# Altium PCB tach key.PcbDoc
Units mm, origin at the board's own origin, x right, y up, seen from the top; angles counter-clockwise.
Board outline 151 x 86.38 mm, 2 copper layers (Top Layer, Bottom Layer); 89 components, 56 nets, 238 pads, 0 vias.
Unrouted connection lines stored in the file: 5.
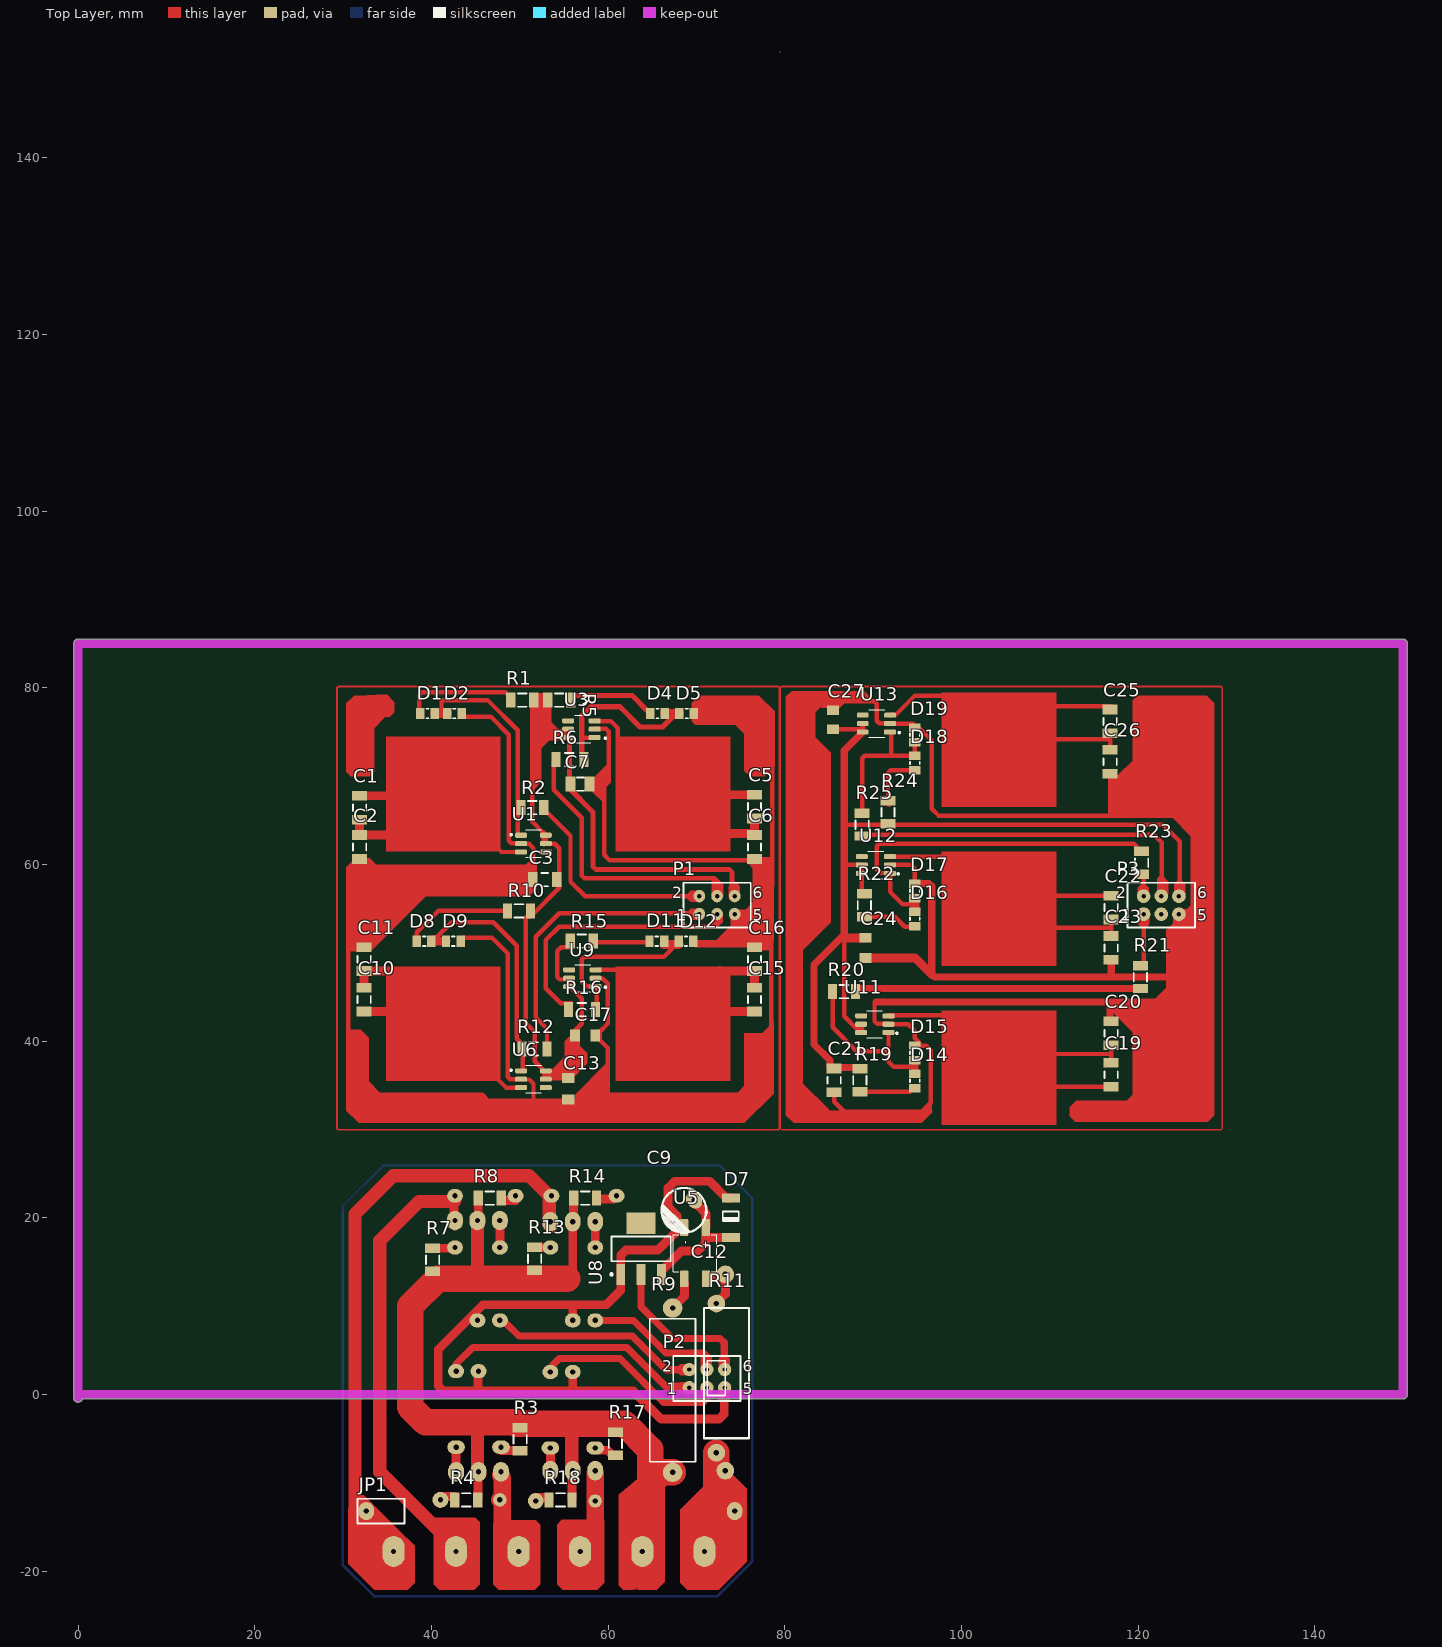
[diagram p0: Top Layer view]
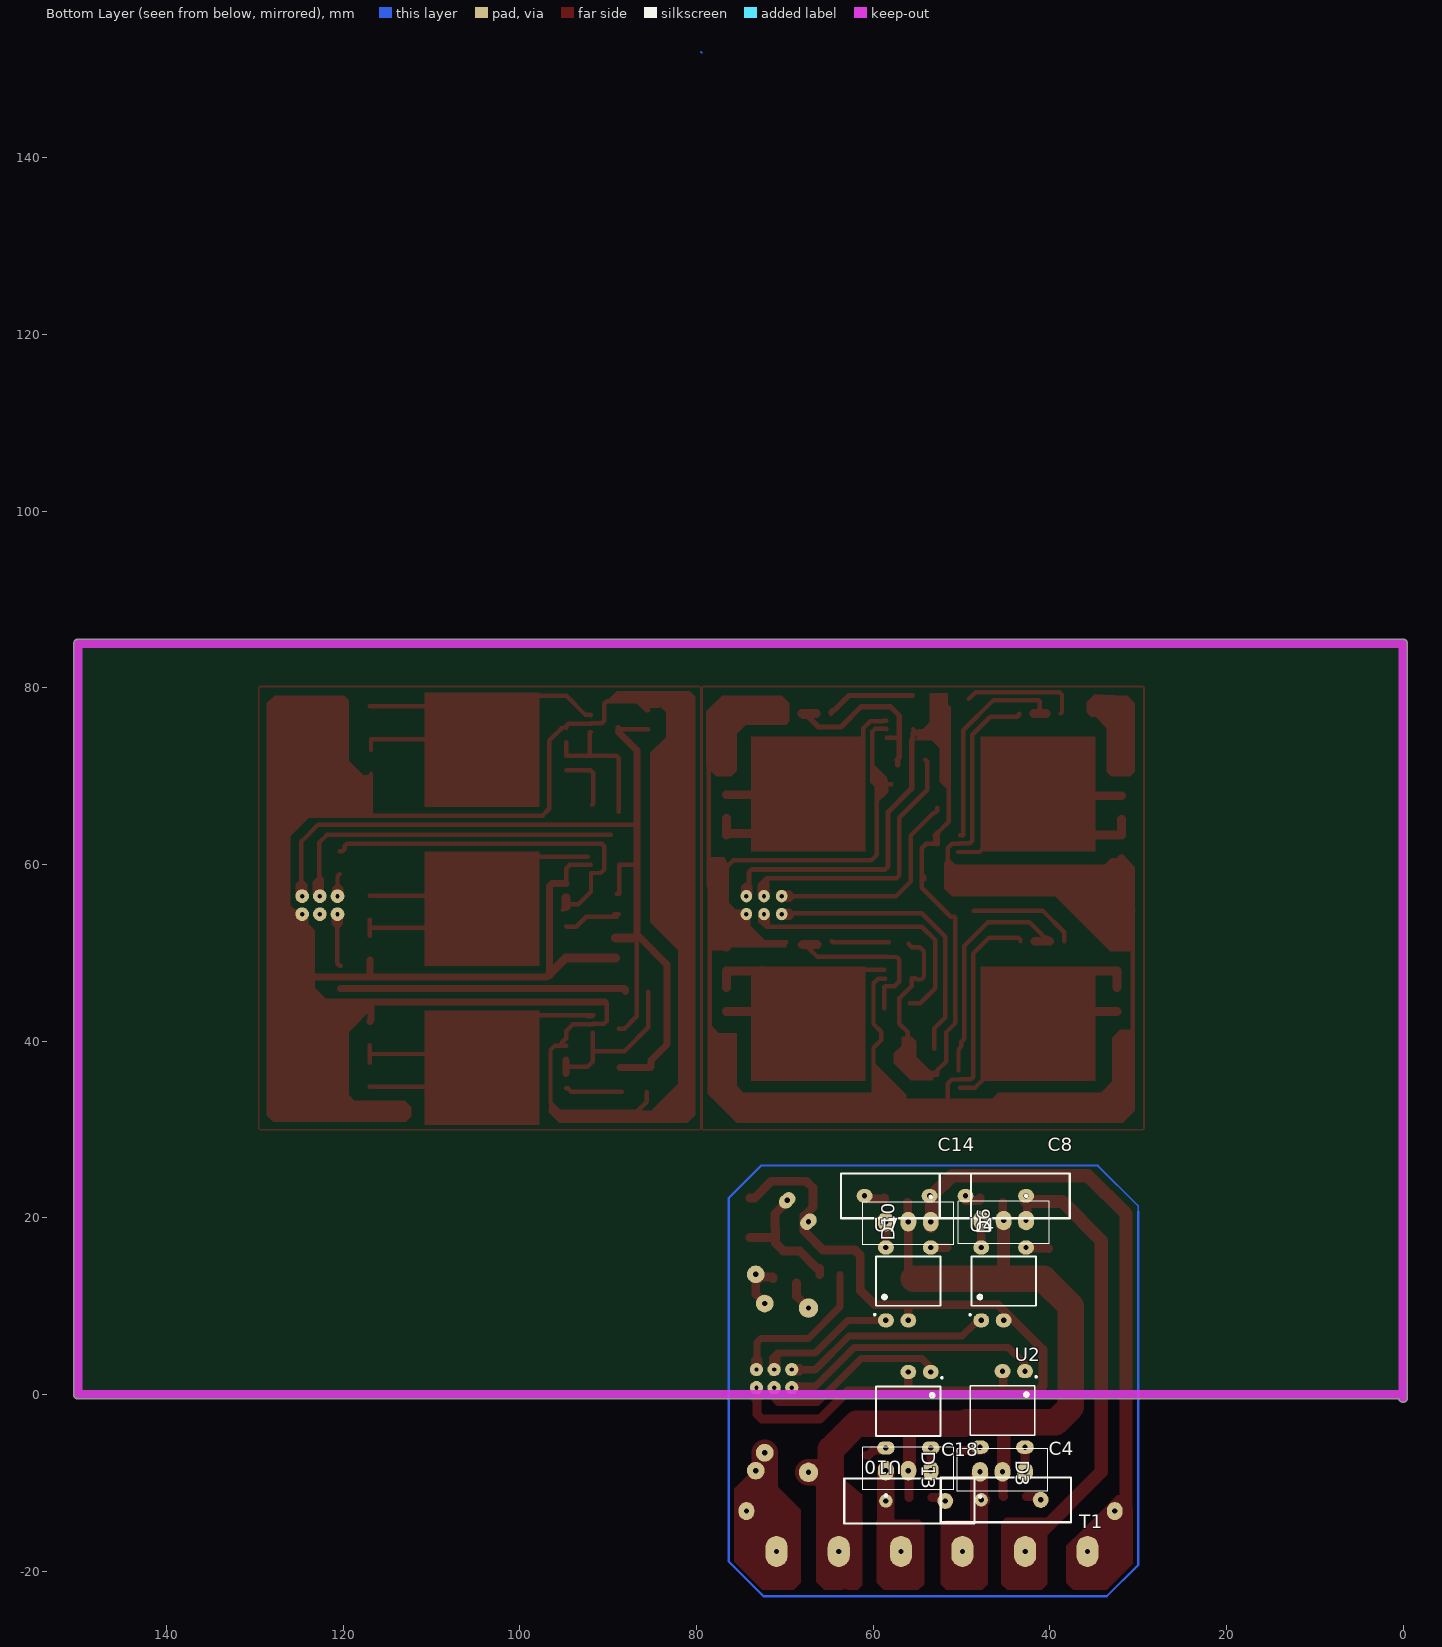
[diagram p1: Bottom Layer view, seen from below]

## Layer stack, top to bottom
Top Solder: solder mask 0.0102, Solder Resist, Dk 3.5
Top Layer: signal copper 0.0356
Dielectric 1: dielectric 0.32, FR-4, Dk 4.8
Bottom Layer: signal copper 0.0356
Bottom Solder: solder mask 0.0102, Solder Resist, Dk 3.5

## Board outline
-0.5,-0.381 -0.5,85 cw(c0,85) 0,85.5 150,85.5 cw(c150,85) 150.5,85 150.5,0 cw(c150,0) 150,-0.5 0.486,-0.5 cw(c0,-0.381)

## Design rules (kind name [scope] priority, off if disabled: settings)
Clearance Clearance_1 [InPolygon] p1: gap=0.8 ignorepadtopadclearanceinfootprint=FALSE
Clearance [All] p2: gap=0.254 ignorepadtopadclearanceinfootprint=FALSE except(0: Arc-Hole Track-Hole SMDPad-Hole THPad-Hole Via-Hole Fill-Hole Poly-Hole Region-Hole Text-Hole)
PolygonConnect [All] p1: connectstyle=Relief reliefconductorwidth=0.254 reliefentries=4 polygonreliefangle="90 Angle" airgapwidth=0.254
RoomDefinition "tach key" [InComponentClass('tach key')] p1: confinementstyle=ConfineIn formatcopy=TRUE lockcomponents=FALSE outline 144.907,-4.953 247.904,-4.953 247.904,23.114 144.907,23.114
RoutingLayers [All] p1: top layer_v5=FALSE bottom layer_v5=TRUE
RoutingVias [All] p1: holewidth=0.711 width=2.5 viastyle="Through Hole" minholewidth=0.711 minwidth=1.27 maxholewidth=0.711 maxwidth=2
SolderMaskExpansion [All] p1: expansion=0.102 istentingtop=FALSE
Width [All] p1: maxlimit=3 minlimit=0.5 preferedwidth=1
29 further rules are at their usual default settings.

## Components (designator, comment, footprint, x,y, rotation, side; value= is the part's Value field where it differs from the comment)
C1 "Cap Semi" C1206#1 31.877,66.421 r90 top value=100pF
C2 "Cap Semi" C1206#1 31.877,61.976 r270 top value=100pF
C3 "Cap Semi" C1206#1 52.832,58.293 r0 top value=100pF
C4 "=Value" CAP-30#1 44.958,-11.938 r180 bottom
C5 "Cap Semi" C1206#1 76.581,66.548 r90 top value=100pF
C6 "Cap Semi" C1206#1 76.581,61.976 r270 top value=100pF
C7 "Cap Semi" C1206#2 56.896,69.088 r180 top value=100pF
C8 "=Value" CAP-30#2 45.085,22.479 r0 bottom
C9 "=Value" ELEC-CAP-RAD10-20 68.58,20.828 r45 top
C10 "Cap Semi" C1206#1 32.385,44.704 r90 top value=100pF
C11 "Cap Semi" C1206#1 32.385,49.276 r90 top value=100pF
C12 "=Value" CAP-30#3 73.406,2.413 r90 top
C13 "Cap Semi" C0805#1 55.499,34.544 r90 top value=100pF
C14 "=Value" CAP-30#4 56.261,22.479 r0 bottom
C15 "Cap Semi" C1206#1 76.581,44.704 r90 top value=100pF
C16 "Cap Semi" C1206#1 76.581,49.276 r90 top value=100pF
C17 "Cap Semi" C0805#2 57.404,40.64 r180 top value=100pF
C18 "=Value" CAP-30#5 55.88,-12.065 r180 bottom
C19 "Cap Semi" C1206#1 116.967,36.195 r90 top value=100pF
C20 "Cap Semi" C1206#1 116.967,40.894 r90 top value=100pF
C21 "Cap Semi" C1206#1 85.598,35.56 r90 top value=100pF
C22 "Cap Semi" C1206#1 116.967,55.118 r90 top value=100pF
C23 "Cap Semi" C1206#1 116.967,50.546 r270 top value=100pF
C24 "Cap Semi" C0805#2 89.154,50.546 r90 top value=100pF
C25 "Cap Semi" C1206#1 116.84,76.2 r90 top value=100pF
C26 "Cap Semi" C1206#1 116.84,71.628 r270 top value=100pF
C27 "Cap Semi" C0805#3 85.471,76.327 r270 top value=100pF
D1 "MODEL" "RES 0805 (2012X06L)" 39.574,77.089 r0 top
D2 "MODEL" "RES 0805 (2012X06L)" 42.622,77.089 r0 top
D3 "BTA16-600CW3G" *TO254P1028X482X1968-3 47.879,-8.763 r180 bottom
D4 "MODEL" "RES 0805 (2012X06L)" 65.608,77.089 r0 top
D5 "MODEL" "RES 0805 (2012X06L)" 68.91,77.089 r0 top
D6 "BTA16-600CW3G" *TO254P1028X482X1968-3 42.672,19.685 r0 bottom
D7 "MODEL" DO-35-STAND 73.914,21.336 r270 top
D8 "MODEL" "RES 0805 (2012X06L)" 39.192,51.308 r0 top
D9 "MODEL" "RES 0805 (2012X06L)" 42.494,51.308 r0 top
D10 "BTA16-600CW3G" *TO254P1028X482X1968-3 53.467,19.558 r0 bottom
D11 "MODEL" "RES 0805 (2012X06L)" 65.532,51.308 r0 top
D12 "MODEL" "RES 0805 (2012X06L)" 68.834,51.308 r0 top
D13 "BTA16-600CW3G" *TO254P1028X482X1968-3 58.547,-8.636 r180 bottom
D14 "MODEL" "RES 0805 (2012X06L)" 94.742,35.51 r90 top
D15 "MODEL" "RES 0805 (2012X06L)" 94.742,38.685 r90 top
D16 "MODEL" "RES 0805 (2012X06L)" 94.742,53.848 r90 top
D17 "MODEL" "RES 0805 (2012X06L)" 94.742,57.023 r90 top
D18 "MODEL" "RES 0805 (2012X06L)" 94.742,71.501 r90 top
D19 "MODEL" "RES 0805 (2012X06L)" 94.742,74.676 r90 top
JP1 "Jumper" "Header 2X1" 34.29,-13.208 r180 top
P1 "Header 3X2" HDR2X3#1 69.801,54.121 r0 top
P2 "Header 3X2" HDR2X3#2 68.658,0.527 r0 top
P3 "Header 3X2" HDR2X3#3 120.093,54.121 r0 top
R1 "10K" "RES 1206 (3216X08L)"#1 50.292,78.613 r0 top
R2 "10K" "RES 1206 (3216X08L)"#1 51.435,66.421 r0 top
R3 "10K" "RES 1206 (3216X08L)"#1 50.038,-5.08 r90 top
R4 "10K" "RES 1206 (3216X08L)"#1 43.942,-11.938 r0 top
R5 "10K" "RES 1206 (3216X08L)"#1 54.483,78.613 r180 top
R6 "10K" "RES 1206 (3216X08L)"#2 55.626,71.866 r180 top
R7 "10K" "RES 1206 (3216X08L)"#1 40.132,15.24 r270 top
R8 "10K" "RES 1206 (3216X08L)"#1 46.609,22.225 r180 top
R9 "10K" Res-(2/1) 67.31,9.779 r270 top
R10 "10K" "RES 1206 (3216X08L)"#1 49.911,54.737 r0 top
R11 "10K" Res-(1/4) 72.263,1.905 r270 top
R12 "10K" "RES 1206 (3216X08L)"#3 51.562,39.116 r0 top
R13 "10K" "RES 1206 (3216X08L)"#1 51.689,15.367 r270 top
R14 "10K" "RES 1206 (3216X08L)"#1 57.404,22.225 r180 top
R15 "10K" "RES 1206 (3216X08L)"#1 57.023,51.308 r180 top
R16 "10K" "RES 1206 (3216X08L)"#4 57.023,43.561 r180 top
R17 "10K" "RES 1206 (3216X08L)"#1 60.833,-5.588 r90 top
R18 "10K" "RES 1206 (3216X08L)"#1 54.61,-11.938 r0 top
R19 "10K" "RES 1206 (3216X08L)"#1 88.519,35.56 r90 top
R20 "10K" "RES 1206 (3216X08L)"#1 86.71,45.593 r0 top
R21 "10K" "RES 1206 (3216X08L)"#1 120.269,47.244 r90 top
R22 "10K" "RES 1206 (3216X08L)"#1 89.027,55.372 r90 top
R23 "10K" "RES 1206 (3216X08L)"#1 120.396,60.198 r270 top
R24 "10K" "RES 1206 (3216X08L)"#1 91.694,65.913 r270 top
R25 "10K" "RES 1206 (3216X08L)"#1 88.773,64.516 r270 top
T1 "Phoenix terminal" "phoenix terminal 6" 69.778,-29.464 r180 bottom
U1 "TTP223_" SOT95P285X126-6N#1 51.562,62.357 r0 top
U2 "K3021P" DIP762W50P254L730H410Q6#1 45.339,-1.813 r270 bottom
U3 "TTP223_" SOT95P285X126-6N#2 57.15,75.311 r180 top
U4 "K3021P" DIP762W50P254L730H410Q6#2 45.212,12.827 r90 bottom
U5 "MB6S" SOIC245P670X270-4N 69.85,16.002 r270 top
U6 "TTP223_" SOT95P285X126-6N#1 51.562,35.687 r0 top
U7 "K3021P" DIP762W50P254L730H410Q6#2 56.007,12.827 r90 bottom
U8 "LM1117MP-3.3" MP04A_N 63.74,16.489 r90 top
U9 "TTP223_" SOT95P285X126-6N#3 57.15,47.117 r180 top
U10 "K3021P" DIP762W50P254L730H410Q6#1 56.007,-1.905 r270 bottom
U11 "TTP223_" SOT95P285X126-6N#4 90.17,41.91 r180 top
U12 "TTP223_" SOT95P285X126-6N#5 90.297,59.944 r180 top
U13 "TTP223_" SOT95P285X126-6N#6 90.424,75.946 r180 top

## Footprints (in the part's own frame and the unit in brackets; to place one, negate y for a bottom-side part, rotate by r counter-clockwise, add the part's x,y. Pads: shape width x height; smd on the part's side, far side on the other; paste and mask are expansions set on the pad)
*TO254P1028X482X1968-3 [mm]
  oval 1.8x2.2 hole 0.6: 1(0,0) 2(2.54,0) 3(5.08,0)
  silkscreen extent -2.6,-2.9 7.68,2.64
C0805#1 [mm] "Chip Capacitor, Body 2.0x1.3mm, IPC High Density"
  rect 1.1x1.4 smd: 1(-1.143,0) 2(1.27,0)
  body extent -1.1,-0.72 1.1,0.72, height 1.4
C0805#2 [mm] "Chip Capacitor, Body 2.0x1.3mm, IPC High Density"
  rect 1.1x1.4 smd: 1(-1.143,0) 2(1.143,0)
  body extent -1.1,-0.72 1.1,0.72, height 1.4
C0805#3 [mm] "Chip Capacitor, Body 2.0x1.3mm, IPC High Density"
  rect 1.1x1.4 smd: 1(-1.143,0) 2(1.016,0)
  body extent -1.1,-0.72 1.1,0.72, height 1.4
C1206#1 [mm] "Chip Capacitor, Body 3.2x1.6mm, IPC High Density"
  rect 1.1x1.7 smd: 1(-1.35,0) 2(1.35,0)
  silkscreen extent -0.4,-0.75 0.4,0.75, body extent -1.7,-0.9 1.7,0.9, height 1.3
C1206#2 [mm] "Chip Capacitor, Body 3.2x1.6mm, IPC High Density"
  rect 1.1x1.7 smd: 1(-1.016,0) 2(1.143,0)
  silkscreen extent -0.4,-0.75 0.4,0.75, body extent -1.7,-0.9 1.7,0.9, height 1.3
CAP-30#1 [mm]
  round 1.524 hole 0.6: 1(-2.794,0)
  round 1.8 hole 0.6: 2(3.937,0)
  silkscreen extent -7.37,-2.54 7.37,2.54, body extent -7.65,-4.29 7.65,4.29, height 17.96
CAP-30#2 [mm]
  oval 1.8x1.524 hole 0.6: 1(-2.413,0) 2(4.445,0)
  silkscreen extent -7.37,-2.54 7.37,2.54, body extent -7.65,-4.29 7.65,4.29, height 17.96
CAP-30#3 [mm]
  round 2 hole 0.6: 1(-11.049,0.127) 2(11.176,0.127)
  silkscreen extent -7.37,-2.54 7.37,2.54, body extent -7.65,-4.29 7.65,4.29, height 17.96
CAP-30#4 [mm]
  oval 1.8x1.524 hole 0.6: 1(-2.667,0) 2(4.699,0)
  silkscreen extent -7.37,-2.54 7.37,2.54, body extent -7.65,-4.29 7.65,4.29, height 17.96
CAP-30#5 [mm]
  round 1.524 hole 0.6: 1(-2.667,0)
  round 1.8 hole 0.6: 2(4.064,0)
  silkscreen extent -7.37,-2.54 7.37,2.54, body extent -7.65,-4.29 7.65,4.29, height 17.96
DIP762W50P254L730H410Q6#1 [mm]
  oval 1.6x1.8 hole 0.6: 1(-4.444,2.54) 2(-4.444,0)
  oval 1.5x2 hole 0.6: 4(4.156,-2.54) 6(4.156,2.54)
  silkscreen extent -3.9,-3.65 2.8,3.9
DIP762W50P254L730H410Q6#2 [mm]
  oval 1.6x1.8 hole 0.6: 1(-4.442,2.54) 2(-4.442,0) 4(3.81,-2.54) 6(3.81,2.54)
  silkscreen extent -3.9,-3.65 2.8,3.9
DO-35-STAND [mm]
  rect 1x2 smd: 1(-0.889,0) 2(3.556,0)
  silkscreen extent 0.63,-0.94 1.73,0.87, body extent -0.81,-0.81 2.77,0.84, height 5.5
ELEC-CAP-RAD10-20 [mil]
  oval 60x80 hole 23.62: 1(-70.71,0) 2(63.64,0)
  silkscreen extent -100,-100 100,100, body extent -124,-124 124,124, height 404
HDR2X3#1 [mm] "Connector; Header; 3x2 Position"
  oval 1.3x1.4 hole 0.5: 1(0.54,0.26) 2(0.54,2.29) 3(2.54,0.26) 4(2.54,2.29) 5(4.54,0.26) 6(4.54,2.29)
  silkscreen extent -1.27,-1.27 6.35,3.81
HDR2X3#2 [mm] "Connector; Header; 3x2 Position"
  round 1.5 hole 0.5: 1(0.54,0.25) 2(0.54,2.29) 3(2.54,0.25) 4(2.54,2.29) 5(4.54,0.25) 6(4.54,2.29)
  silkscreen extent -1.27,-1.27 6.35,3.81
HDR2X3#3 [mm] "Connector; Header; 3x2 Position"
  round 1.55 hole 0.5: 1(0.54,0.25) 2(0.54,2.29) 3(2.54,0.25) 4(2.54,2.29) 5(4.54,0.25) 6(4.54,2.29)
  silkscreen extent -1.27,-1.27 6.35,3.81
"Header 2X1" [mil]
  oval 70x80 hole 23.62: 1(-1576.5,0) 2(65,0)
  silkscreen extent -105,-55 105,55, body extent -100,-50 100,50, height 374
MP04A_N [mm] "SOT223, 4-Leads, Body 6.5x3.5mm, Pitch 2.3mm, Lead Span 7mm, IPC Medium Density"
  rect 2.4x1 smd: 1(-2.9,2.3) 2(-2.9,0) 3(-2.9,-2.3)
  rect 2.4x3.3 smd: 4(2.9,0)
  silkscreen extent -3.02,-3.35 1.4,3.47, body extent -1.85,-3.35 1.85,3.35, height 1.8
"phoenix terminal 6" [mm] "6 terminals"
  oval 2.5x3.5 hole 0.6: 1(-1.143,11.684) 2(5.897,11.684) 3(12.937,11.684) 4(19.897,11.684) 5(26.997,11.684) 6(34.057,11.684)
"RES 0805 (2012X06L)" [mm] "Chip Resistor, 2-Leads, Body 2.0x1.3mm, IPC High Density _ (0.100 W)"
  rect 0.95x1.3 smd: 1(-0.838,0) 2(0.812,0)
  silkscreen extent -0.16,-0.55 0.14,0.55, body extent -1.03,-0.63 1,0.64, height 0.6
"RES 1206 (3216X08L)"#1 [mm] "Chip Resistor, 2-Leads, Body 3.2x1.6mm, IPC High Density _ (0.125 W)"
  rect 1.05x1.7 smd: 1(-1.295,0) 2(1.301,0)
  silkscreen extent -0.5,-0.75 0.5,0.75, body extent -1.52,-0.76 1.53,0.76, height 0.6
"RES 1206 (3216X08L)"#2 [mm] "Chip Resistor, 2-Leads, Body 3.2x1.6mm, IPC High Density _ (0.125 W)"
  rect 1.05x1.7 smd: 1(-1.651,0) 2(1.524,0)
  silkscreen extent -0.5,-0.75 0.5,0.75, body extent -1.52,-0.76 1.53,0.76, height 0.6
"RES 1206 (3216X08L)"#3 [mm] "Chip Resistor, 2-Leads, Body 3.2x1.6mm, IPC High Density _ (0.125 W)"
  rect 1.05x1.7 smd: 1(-1.295,0) 2(1.524,0)
  silkscreen extent -0.5,-0.75 0.5,0.75, body extent -1.52,-0.76 1.53,0.76, height 0.6
"RES 1206 (3216X08L)"#4 [mm] "Chip Resistor, 2-Leads, Body 3.2x1.6mm, IPC High Density _ (0.125 W)"
  rect 1.05x1.7 smd: 1(-1.549,0) 2(1.499,0)
  silkscreen extent -0.5,-0.75 0.5,0.75, body extent -1.52,-0.76 1.53,0.76, height 0.6
Res-(1/4) [mm]
  round 2 hole 0.6: 1(-8.382,0) 2(8.509,0)
  silkscreen extent -1.91,-1.02 2.03,1.02, body extent -3.43,-0.93 3.43,0.91, height 2.92
Res-(2/1) [mm]
  round 2.2 hole 0.6: 1(0,0) 2(18.6,0)
  silkscreen extent 1.2,-2.6 17.4,2.6, body extent 1.28,-1.98 17.32,1.92, height 7.03
SOIC245P670X270-4N [mm]
  rrect23% 1.91x0.91 smd: 1(-2.9,1.225) 2(-2.9,-1.225) 3(2.9,-1.225) 4(2.9,1.225)
  silkscreen extent -4.68,-2.48 2.1,2.48
SOT95P285X126-6N#1 [mm]
  rrect50% 1.35x0.57 smd: 1(-1.41,0.95) 2(-1.41,0) 3(-1.41,-0.95) 4(1.39,-0.95) 5(1.39,0) 6(1.39,0.95)
  silkscreen extent -2.64,-1.56 0.9,1.56
SOT95P285X126-6N#2 [mm]
  rrect50% 1.35x0.57 smd: 1(-1.329,0.95) 2(-1.329,0) 3(-1.329,-0.95) 4(1.671,-0.95) 5(1.671,0) 6(1.671,0.95)
  silkscreen extent -2.64,-1.56 0.9,1.56
SOT95P285X126-6N#3 [mm]
  rrect50% 1.35x0.57 smd: 1(-1.448,0.95) 2(-1.448,0) 3(-1.448,-0.95) 4(1.552,-0.95) 5(1.552,0) 6(1.552,0.95)
  silkscreen extent -2.64,-1.56 0.9,1.56
SOT95P285X126-6N#4 [mm]
  rrect50% 1.35x0.57 smd: 1(-1.582,0.95) 2(-1.582,0) 3(-1.582,-0.95) 4(1.518,-0.95) 5(1.518,0) 6(1.518,0.95)
  silkscreen extent -2.64,-1.56 0.9,1.56
SOT95P285X126-6N#5 [mm]
  rrect50% 1.35x0.57 smd: 1(-1.636,0.95) 2(-1.636,0) 3(-1.636,-0.95) 4(1.564,-0.95) 5(1.564,0) 6(1.564,0.95)
  silkscreen extent -2.64,-1.56 0.9,1.56
SOT95P285X126-6N#6 [mm]
  rrect50% 1.35x0.57 smd: 1(-1.509,0.95) 2(-1.509,0) 3(-1.509,-0.95) 4(1.591,-0.95) 5(1.591,0) 6(1.591,0.95)
  silkscreen extent -2.64,-1.56 0.9,1.56

## Part data
C1 C2 C3 C5 C6 C7 C10 C11 C13 C15 C16 C17 C19 C20 C21 C22 C23 C24 C25 C26 C27: "Capacitor (Semiconductor SIM Model)", LatestRevisionDate=29-May-2009, LatestRevisionNote="IPC-7351 Footprint Added.", PackageDescription="Chip Capacitor", PackageReference=C1206, Published=8-Jun-2000, Publisher="Altium Limited"
C4 C8 C12 C14 C18: library part Capacitor, "Capacitor"
C9: library part "Capacitor Electrolytic", "Electrolytic Capacitor"
D1 D2 D4 D5 D8 D9 D11 D12 D14 D15 D16 D17 D18 D19: library part "LED 5mm", "Typical LED", COLOR=RED
D3 D6 D10 D13: "TRIAC Standard 600V 16A Through Hole TO-220AB", Package="TO-220 ON Semiconductor", Arrow_Americas-Purchase-URL=https://snapeda.com/shop?store=Arrow+Americas&id=390940, Availability=Unavailable, DigiKey-Purchase-URL=https://snapeda.com/shop?store=DigiKey&id=390940, MF="Littelfuse Inc.", Mouser-Purchase-URL=https://snapeda.com/shop?store=Mouser&id=390940, MP=BTA16-600CW3G, Price=None, SnapEDA_Link=https://www.snapeda.com/parts/BTA16-600CW3G/Littelfuse%20Inc./view-part/390940/?ref=snap
D7: library part Diode, "Diode", MODEL=1N4148
P1 P2 P3: "Header, 3-Pin, Dual row", LatestRevisionDate=17-Jul-2002, LatestRevisionNote="Re-released for DXP Platform.", Publisher="Altium Limited"
R1 R2 R3 R4 R5 R6 R7 R8 R9 R10 R11 R12 R13 R14 R15 R16 R17 R18 R19 R20 R21 R22 R23 R24 R25: library part Resistor, "Resistor", Power="1/4 W", Tolerance=5%
T1: library part "Phoenix terminal 6", "Terminal 6 Pin", ComponentLinkURL=www.picpars.com, Designer="Seyed Mohsen Ghasemain", E-mail=picpars@gmail.com
U1 U3 U6 U9 U11 U12 U13: "22 kOhms Â±5% 0.1W, 1/10W Chip Resistor 0402 _1005 Metric_ Automotive AEC-Q200, Moisture Resistant Thick Film", Package="0402 KOA Speer", Availability=Unavailable, MF="KOA Speer", MP=TTP223, Price=None, SnapEDA_Link=https://www.snapeda.com/parts/TTP223%20/KOA%20Speer/view-part/2780209/?ref=snap
U2 U4 U7 U10: "Optoisolator Triac Output 5300Vrms 1 Channel 6-DIP", Package="DIP-6 Vishay", Availability=Unavailable, DigiKey-Purchase-URL=https://snapeda.com/shop?store=DigiKey&id=291595, MF="Vishay Semiconductor", Mouser-Purchase-URL=https://snapeda.com/shop?store=Mouser&id=291595, MP=K3021P, Price=None, SnapEDA_Link=https://www.snapeda.com/parts/K3021P/Vishay%20Semiconductor%20Opto%20Division/view-part/291595/?ref=snap
U5: "Bridge Rectifier Single Phase Standard 600V Surface Mount 4-SOIC", Package="BESOP-4 Surge Components", Digi-Key_Part_Number=MB6SCT-ND, Digi-Key_Purchase_URL=https://www.digikey.com.tr/product-detail/en/on-semiconductor/MB6S/MB6SCT-ND/965654?utm_source=snapeda&utm_medium=aggregator&utm_campaign=symbol, MF="ON Semiconductor", MP=MB6S, SnapEDA_Link=https://www.snapeda.com/parts/MB6S/ON%20Semiconductor/view-part/2774209/?ref=snap
U8: "800mA Low-Dropout Linear Regulator", DigiKeyPartNumber=LM1117MP-3.3CT-ND, Manufacturer="National Semiconductor", PackageTopMarking=XYTT*N05A, PowerWise=N, Code_IPC=SOT223-4, Code_JEDEC=TO-261-AA, ComponentLink1Description="LM1117 Datasheet", ComponentLink1URL=http://www.national.com/ds/LM/LM1117.pdf, ComponentLink2Description="LM1117 Web Page", ComponentLink2URL=http://www.national.com/pf/LM/LM1117.html, ComponentLink3Description="MP04A Package Page", ComponentLink3URL=http://www.national.com/packaging/folders/mp04a.html, CompType="LDO IC", DatasheetVersion=Apr-2006, PackageDescription="Molded SOT-223, 6.50 x 3.56 x 1.6mm Body, 4 Lead, 2.3mm Pitch", PackageReference=MP04A, PackageVersion="revB, Apr-2003", PartNumber=LM1117MP-3.3, PinCount=4, Published=4-Dec-2008, Publisher="Altium Limited", RoHS=O

## Nets (pads, with @x,y where several pads share a name; then routed paths per layer and width w, separated by ;. In a path a pad name is that pad's centre, name@x,y a point inside that pad or via, vN(x,y) a via of type N, cw(c..) or ccw(c..) an arc to the next point about the centre after c; other vN are vias at no path point)
faz: D3.2 D6.2 D10.2 D13.2 R3.2 R4.2 R7.2 R8.2 R9.2 R13.2 R14.2 R17.2 R18.2 T1.2 | length 122.4
  Top Layer w1: D3.2@45.206,-8.503 45.268,-8.565 45.268,-11.532 R4.2@45.243,-11.557 ; 45.206,-4.396 45.792,-3.81 49.682,-3.81 49.713,-3.779 R3.2 ; 45.227,13.985 45.243,13.97 ; D6.2@45.227,19.543 45.212,19.558 45.308,19.654 R8.2@45.308,21.717 ; R3.2@50.459,-3.683 55.88,-3.683 60.069,-3.683 60.14,-3.754 60.999,-3.754 ; 55.372,13.081 56.007,13.716 D10.2@56.007,19.05 ; D13.2@55.88,-8.763 55.936,-8.819 55.936,-11.659 R18.2@55.911,-11.684 ; D10.2@56.078,19.05 56.078,21.692 R14.2@56.103,21.717
  Top Layer w1.5: D3.2@45.206,-8.503 45.206,-4.396 ; 45.227,13.985 45.227,19.05 D6.2@45.227,19.543 ; D13.2@55.88,-8.763 55.88,-3.683
  Top Layer w3: 49.434,-3.175 45.206,-3.175 39.349,-3.175 37.592,-1.418 37.592,9.978 40.695,13.081 45.227,13.081 51.689,13.081 55.372,13.081 ; R3.2@49.682,-3.302 55.88,-3.302 60.069,-3.302 61.849,-3.302 64.77,-6.223 64.77,-8.821 64.77,-10.033 ; T1.2@63.901,-18.288 64.77,-17.419 64.77,-10.033 ; R9.2 65.982,-8.821 64.77,-10.033
GND: C2.2 C3.1 C6.2 C7.1 C9.1 C11.2 C13.1 C16.2 C17.1 C20.2 C21.1 C23.2 C24.1 C26.2 C27.1 D2.2 D5.2 D7.1 D9.2 D12.2 D15.2 D17.2 D19.2 P1.5 P2.5 P3.5 U1.2 U2.2 U3.2 U4.2 U5.2 U6.2 U7.2 U8.1 U9.2 U10.2 U11.2 U12.2 U13.2 | length 564.2
  Top Layer w0.5: D9.2 43.306,51.464 43.531,51.689 46.863,51.689 48.641,49.911 48.641,35.98 48.934,35.687 U6.2 50.187,35.652 51.089,35.652 51.562,35.179 51.562,33.274 ; D2.2 43.434,76.933 43.659,76.708 46.736,76.708 48.768,74.676 48.768,62.685 49.061,62.392 U1.2@50.152,62.392 ; U1.2 50.187,62.322 51.089,62.322 51.562,61.849 C3.1@51.562,58.42 ; C3.1@50.991,57.849 50.165,57.023 32.799,57.023 30.56,54.784 30.607,54.737 30.607,36.957 34.29,33.274 51.562,33.274 ; C3.1@51.015,57.826 C3.1 ; C7.1 59.563,69.088 ; U3.2 58.514,75.346 59.778,75.346 60.071,75.053 60.071,69.381 59.778,69.088 59.563,69.088 ; U9.2@58.598,47.082 59.399,47.082 59.944,46.537 59.944,41.944 59.055,41.055 59.055,40.131 59.944,39.242 59.944,33.655 59.563,33.274 ; D5.2 75.311,77.089 78.613,73.787 78.613,57.574 78.486,57.447 ; D12.2@69.803,51.181 72.39,51.181 74.93,53.721 P1.5@74.93,54.229 ; P2.5@73.406,0.127 P2.5@73.406,0.635 ; 75.692,54.61 76.581,55.499 ; C6.2@77.072,60.435 76.454,59.817 ; C27.1 85.621,77.47 86.637,78.486 90.131,78.486 90.424,78.193 90.424,76.274 90.717,75.981 91.898,75.981 U13.2 94.488,75.946 94.742,75.692 D19.2 ; C21.1 85.598,33.147 86.741,32.004 95.504,32.004 96.52,33.02 96.52,38.989 96.012,39.497 D15.2 ; 90.336,44.45 90.17,44.284 90.17,42.238 90.463,41.945 91.717,41.945 U11.2 93.98,41.91 94.742,41.148 94.742,40.322 D15.2@95.242,39.822 ; U12.2 94.322,59.944 94.742,59.524 D17.2 ; D19.2@95.171,75.488 95.784,74.875 95.796,74.875 96.647,74.025 96.647,66.294 97.409,65.532 116.84,65.532 ; 116.84,44.45 116.967,44.323 C20.2 ; C26.2 116.84,65.532 ; P3.5@124.333,53.848 P3.5@124.333,54.521 ; 125.349,53.975 P3.5@125.349,54.483 ; 126.365,63.119 123.952,65.532 116.84,65.532 ; 51.562,33.274 59.563,33.274 ; 59.563,33.274 74.803,33.274 78.486,36.957 78.486,57.447 ; 59.563,69.088 59.563,61.087 60.198,60.452 75.819,60.452 76.454,59.817 ; 76.454,59.817 76.581,59.69 76.581,55.499 ; 76.581,55.499 78.359,53.721 78.359,57.32 78.486,57.447
  Top Layer w0.8: 90.336,44.45 116.84,44.45 ; D17.2 96.354,57.835 96.647,57.542 96.647,47.537 96.94,47.244 116.967,47.244 ; C20.2 116.84,42.371 116.84,44.45 ; C23.2 116.967,47.244 ; P3.5@124.333,53.848 124.333,47.006 ; P3.5@124.46,53.848 P3.5@124.858,54.246 ; P3.5@124.633,54.521 124.662,54.55 125.67,54.55 126.365,55.245 126.365,63.119 ; 116.84,44.45 122.174,44.45 124.333,46.609 124.333,47.006 ; 116.967,47.244 124.095,47.244 124.333,47.006
  Top Layer w1: 31.518,50.8 31.642,50.676 32.335,50.676 C11.2 ; C2.2 31.877,57.785 32.512,57.15 ; U2.2@45.339,2.285 45.262,2.208 45.262,0.431 45.212,0.381 ; U10.2@56.007,2.285 56.007,0.381 ; U7.2 56.007,10.033 ; P2.5 73.152,0.731 73.152,0.127 73.152,-2.208 72.566,-2.794 66.04,-2.794 62.865,0.381 56.007,0.381 ; D7.1 73.414,22.225 71.509,24.13 67.564,24.13 66.802,23.368 66.802,21.209 67.813,20.198 67.813,19.378 67.813,18.537 65.618,16.342 62.026,16.342 61.44,15.756 U8.1 61.44,11.783 59.817,10.16 56.007,10.16 45.847,10.16 40.767,5.08 40.767,0.967 41.353,0.381 45.212,0.381 ; P1.5@74.93,54.229 76.581,52.578 C16.2 ; C24.1 94.781,49.403 96.647,47.537 ; 45.212,0.381 56.007,0.381
NetC1_1: C1.1 C1.2 C2.1 U1.3 | length 15.8
  Top Layer w0.5: 46.101,63.246 47.94,61.407 U1.3@50.377,61.407
  Top Layer w1: C1.1 C2.1 35.734,63.326 35.941,63.119 ; C1.2 36.656,67.771 36.703,67.818
NetC4_2: C4.2 R4.1 | length 1.5
  Top Layer w1: C4.2@41.148,-11.557 R4.1@42.647,-11.557
NetC5_1: C5.1 C5.2 C6.1 U3.3 | length 16.5
  Top Layer w0.5: U3.3 58.869,76.261 58.93,76.2 60.325,76.2 61.087,75.438 61.087,74.221 61.206,74.102 62.296,74.102
  Top Layer w1: 71.374,63.5 76.407,63.5 C6.1 C5.1 ; 72.644,67.945 72.691,67.898 C5.2
NetC8_2: C8.2 R8.1 | length 1.9
  Top Layer w1: R8.1 47.904,21.996 47.929,21.971 C8.2@49.53,21.971
NetC10_1: C10.1 C10.2 C11.1 U6.3 | length 15.1
  Top Layer w0.5: 45.974,36.068 47.239,36.068 47.586,35.721 47.586,35.599 48.448,34.737 U6.3
  Top Layer w1: C10.1 36.402,43.354 36.576,43.18 ; C10.2 C11.1 36.529,47.926 36.576,47.879
NetC12_2: C12.2 R11.1 U5.4 | length 5.2
  Top Layer w1: U5.4@71.329,13.102 71.329,13.241 71.374,13.286 72.693,13.286 73.279,12.7 73.279,11.373 72.263,10.357 R11.1
NetC14_2: C14.2 R14.1 | length 2
  Top Layer w1: R14.1 58.699,22.15 58.724,22.125 C14.2@60.607,22.125
NetC15_1: C15.1 C15.2 C16.1 U9.3 | length 13.6
  Top Layer w0.5: U9.3@58.725,48.067 61.788,48.067 61.849,48.006
  Top Layer w1: 72.009,43.434 72.089,43.354 C15.1 ; 72.644,48.006 72.724,47.926 C16.1 C15.2
NetC18_2: C18.2 R18.1 | length 1.5
  Top Layer w1: C18.2@51.816,-11.684 R18.1@53.315,-11.684
NetC19_1: C19.1 C19.2 C20.1 U11.3 | length 36.8
  Top Layer w0.5: U11.3@91.694,42.926 98.326,42.926 104.272,36.98 ; U11.3 91.787,42.825 92.31,42.825 U11.3@92.336,42.799 ; C19.1 110.522,34.845 108.712,36.655 108.712,38.481 108.775,38.544 116.967,38.544 ; C19.2 116.967,38.544 ; C20.1 116.967,38.544
NetC22_1: C22.1 C22.2 C23.1 U12.3 | length 23.2
  Top Layer w0.5: U12.3@92.314,60.894 98.237,60.894 98.298,60.833 ; 109.22,56.769 109.521,56.468 C22.2 ; 109.601,53.086 109.855,52.832 116.967,52.832 ; C23.1 116.967,52.832 ; C22.1 116.967,52.832
NetC25_1: C25.1 C25.2 C26.1 U13.3 | length 34.1
  Top Layer w0.5: U13.3 91.968,76.931 92.552,76.931 94.742,79.121 98.131,79.121 104.272,72.98 ; 108.077,77.724 108.331,77.978 110.109,77.978 110.156,77.931 C25.2@116.967,77.931 ; 108.839,74.041 108.966,74.168 116.84,74.168 C26.1
NetD1_1: D1.1 R1.1 | length 13.2
  Top Layer w0.5: D1.1 38.608,77.217 38.608,79.209 38.901,79.502 48.387,79.502 R1.1@49.149,78.74
NetD1_2: D1.2 D2.1 R2.1 U1.1 | length 25.4
  Top Layer w0.5: 41.148,76.835 41.148,77.089 41.148,78.489 41.272,78.613 46.355,78.613 49.784,75.184 49.784,66.802 49.784,63.342 49.819,63.307 U1.1
  Top Layer w1: D1.2 41.148,77.089 D2.1
NetD3_3: D3.3 U2.6 | length 2.7
  Top Layer w1: D3.3@42.799,-8.636 U2.6
NetD4_1: D4.1 R5.1 | length 10.2
  Top Layer w0.6: R5.1@55.535,79.121 62.738,79.121 64.42,77.439 64.595,77.439 64.77,77.264 D4.1
NetD4_2: D4.2 D5.1 R6.1 U3.1 | length 21.6
  Top Layer w0.5: 57.023,74.295 57.089,74.361 U3.1
  Top Layer w0.6: R6.1@57.023,72.136 57.023,74.295 57.023,76.835 58.039,77.851 61.341,77.851 63.627,75.565 66.167,75.565 67.341,76.739 67.897,76.739 68.072,76.914 D5.1 ; R6.1@57.213,71.295 57.213,71.803 R6.1
  Top Layer w1: D4.2 67.341,77.089 D5.1
NetD6_3: D6.3 U4.6 | length 2.9
  Top Layer w1: U4.6 D6.3@47.752,19.558
NetD8_1: D8.1 R10.1 | length 12.3
  Top Layer w0.5: D8.1 38.354,52.324 40.767,54.737 R10.1
NetD8_2: D8.2 D9.1 R12.1 U6.1 | length 27.9
  Top Layer w0.5: D8.2 40.004,51.483 40.229,51.708 40.532,51.708 ; 40.786,51.708 40.532,51.708 ; R12.1@50.267,38.989 50.322,38.934 U6.1@50.322,36.672 ; R12.1 49.992,39.391 49.992,39.928 49.657,40.263 49.657,50.8 46.99,53.467 42.291,53.467 40.532,51.708
  Top Layer w1: D8.2 40.786,51.308 D9.1
NetD10_3: D10.3 U7.6 | length 2.4
  Top Layer w1: U7.6 D10.3@58.547,19.05
NetD11_1: D11.1 R15.1 | length 6.6
  Top Layer w0.5: R15.1@58.191,51.181 64.567,51.181 D11.1
NetD11_2: D11.2 D12.1 R16.1 U9.1 | length 20.2
  Top Layer w0.5: U9.1 58.563,46.202 57.557,46.202 57.023,46.736 57.023,49.226 57.316,49.519 58.418,49.519 58.429,49.53 66.294,49.53 67.291,50.527 ; R16.1@58.699,43.688 58.712,43.701 U9.1@58.712,46.154 ; 67.291,50.8 68.199,50.8 D12.1@68.326,50.927
  Top Layer w1: D11.2@66.344,50.927 67.291,50.927 D12.1@67.926,50.927
NetD13_3: D13.3 U10.6 | length 2.4
  Top Layer w1: D13.3@53.467,-8.89 U10.6@53.467,-6.477
NetD14_1: D14.1 R19.1 | length 6.5
  Top Layer w0.5: R19.1@88.435,34.29 94.185,34.29 94.567,34.672 D14.1
NetD14_2: D14.2 D15.1 R20.1 U11.1 | length 19.5
  Top Layer w0.5: R20.1@85.446,45.593 85.446,41.554 88.138,38.862 91.752,38.862 ; U11.1 91.752,38.862 ; 94.742,37.085 92.328,37.085 91.752,37.661 91.752,38.862
  Top Layer w0.8: D14.2 94.742,37.085 D15.1
NetD16_1: D16.1 R22.1 | length 7.1
  Top Layer w0.5: R22.1@88.773,54.352 89.302,54.352 R22.1 92.481,54.077 93.603,52.955 94.687,52.955 D16.1
NetD16_2: D16.2 D17.1 R23.1 U12.1 | length 42
  Top Layer w0.5: D16.2@95.122,54.865 94.742,55.245 94.488,55.499 93.345,55.499 91.933,56.911 U12.1 91.898,59.029 90.831,59.029 90.424,59.436 90.424,62.064 90.717,62.357 119.532,62.357 119.796,62.093 119.796,61.768 120.071,61.493 R23.1
  Top Layer w1: 94.742,55.245 D17.1
NetD18_1: D18.1 R24.1 | length 6.8
  Top Layer w0.5: R24.1@91.821,66.751 91.694,66.878 91.694,70.37 91.987,70.663 D18.1
NetD18_2: D18.2 D19.1 R25.1 U13.1 | length 16.5
  Top Layer w0.5: R25.1@88.773,65.938 88.773,72.02 89.066,72.313 92.075,72.313 ; U13.1 92.04,74.996 92.075,74.961 92.075,72.313 ; D19.1 D18.2 92.075,72.313
NetP2_6: P2.6 U8.2 U8.4 | length 17.8
  Top Layer w0.8: U8.2 63.74,9.92 67.31,6.35 72.683,6.35 73.152,5.881 73.152,2.863 P2.6
NetR3_1: R3.1 U2.4 | length 2.2
  Top Layer w1: U2.4@47.879,-6.315 47.914,-6.35 50.013,-6.35 R3.1
NetR7_1: R7.1 U4.4 | length 2.6
  Top Layer w1: R7.1@40.145,16.523 R7.1 40.152,16.555 42.482,16.555 42.551,16.624 42.659,16.624 U4.4
NetR9_1: R9.1 U5.3 | length 3.4
  Top Layer w1: R9.1 68.67,11.139 U5.3@68.67,12.647
NetR13_1: R13.1 U7.4 | length 1.8
  Top Layer w1: R13.1@51.62,16.637 U7.4
NetR17_1: R17.1 U10.4 | length 2.6
  Top Layer w1: U10.4@58.547,-6.292 58.682,-6.157 59.028,-6.157 59.186,-6.315 59.94,-6.315 60.508,-6.883 R17.1
NetR20_2: R20.2 R21.1 | length 32.6
  Top Layer w0.8: R20.2 88.011,45.849 88.136,45.974 120.244,45.974 R21.1
nol: C12.1 JP1.1 R11.2 T1.1 | length 12.3
  Top Layer w3: T1.1@70.941,-18.288 72.263,-16.966 72.263,-10.541 ; 72.263,-8.636 72.263,-10.414 72.39,-10.541 ; R11.2 72.263,-8.509 C12.1@72.39,-8.636
o1: P1.2 R2.2 | length 25
  Top Layer w0.5: R2.2 52.736,66.096 53.011,65.821 53.178,65.821 55.753,63.246 55.753,58.039 57.404,56.388 70.318,56.388 P1.2
o2: P1.4 R6.2 | length 31.7
  Top Layer w0.5: R6.2 53.848,71.612 53.848,68.453 57.023,65.278 57.023,58.75 57.316,58.457 72.029,58.457 72.322,58.164 72.322,56.534 P1.4@72.341,56.515
o3: P1.1 R12.2 | length 33.2
  Top Layer w0.5: R12.2 53.086,41.402 51.816,42.672 51.816,51.816 54.483,54.483 70.603,54.483 P1.1@70.641,54.521
o4: P1.3 R16.2 | length 30.3
  Top Layer w0.5: R16.2@55.828,44.288 54.645,44.288 52.959,45.974 52.959,51.435 54.483,52.959 72.048,52.959 72.341,53.252 P1.3
o11: P2.2 U4.1 | length 23.8
  Top Layer w0.5: P2.2@69.175,2.921 P2.2@69.198,2.944
  Top Layer w0.8: U4.1 48.068,8.385 48.468,7.985 48.53,7.985 49.911,6.604 62.738,6.604 66.548,2.794 69.175,2.794 P2.2
o12: P2.4 U7.1 | length 15.6
  Top Layer w0.5: P2.4@71.179,3.067 P2.4@71.198,3.048
  Top Layer w0.8: U7.1@58.55,8.382 U7.1@58.553,8.385 ; U7.1@59.061,8.385 62.862,8.385 66.548,4.699 70.729,4.699 71.198,4.23 P2.4@71.198,2.552
o13: P2.1 U2.1 | length 30.5
  Top Layer w0.5: P2.1@69.46,1.016 P2.1@69.498,1.054
  Top Layer w0.8: U2.1@42.799,2.285 42.799,3.429 44.704,5.334 62.103,5.334 66.51,0.927 68.553,0.927 68.569,0.911 69.482,0.911 P2.1@69.498,0.927
o14: P2.3 U10.1 | length 22.2
  Top Layer w0.8: U10.1@53.72,2.538 53.72,3.301 54.483,4.064 61.341,4.064 66.294,-0.889 70.729,-0.889 71.198,-0.42 P2.3@71.198,0.935
o21: P3.1 R21.2 | length 6.3
  Top Layer w0.5: R21.2 120.375,48.545 120.65,48.82 120.65,54.504 P3.1@120.633,54.521 ; P3.1@121.022,54.737 P3.1@121.06,54.775
o22: P3.2 R23.2 | length 2.6
  Top Layer w0.5: R23.2 120.633,58.66 P3.2
o23: P3.4 R25.2 | length 39.6
  Top Layer w0.5: 89.662,63.342 121.824,63.342 122.682,62.484 P3.4@122.682,56.261 ; P3.4@122.741,56.788 P3.4@122.76,56.769
of1: C14.1 D10.1 JP1.2 T1.6 | length 68.7
  Top Layer w1.5: T1.6@35.699,-18.163 35.699,-18.016 34.97,-17.288 34.824,-17.288 31.357,-13.821 31.357,20.435 35.687,24.765 51.06,24.765 53.34,22.485 53.34,19.177 D10.1@53.467,19.05
of2: C8.1 D6.1 T1.5 | length 52.2
  Top Layer w1: T1.5@41.606,-17.093 41.701,-17.093 42.801,-18.194 T1.5@42.801,-18.288 ; 42.545,21.463 42.545,19.177 D6.1@42.672,19.05
  Top Layer w1.5: T1.5@41.606,-17.093 41.606,-16.206 34.163,-8.763 34.163,17.409 38.598,21.844 42.539,21.844 42.666,21.971 C8.1@42.672,21.971
of3: C4.1 D3.1 T1.4 | length 10.2
  Top Layer w1: 47.879,-15.009 49.58,-16.71 49.58,-18.047 T1.4@49.821,-18.288
  Top Layer w2: C4.1 C4.1@48.006,-11.684 ; D3.1@47.879,-9.144 47.979,-9.244 47.979,-9.444 48.006,-9.471 C4.1@48.006,-11.684 ; 48.006,-14.882 C4.1@48.006,-11.684
of4: C18.1 D13.1 T1.3 | length 10.1
  Top Layer w1: T1.3@56.861,-18.288 56.861,-18.138 58.547,-16.452
  Top Layer w1.5: C18.1@58.547,-11.926 C18.1@58.547,-11.684
  Top Layer w2: 58.547,-16.452 C18.1@58.547,-11.926 ; C18.1@58.547,-11.684 D13.1@58.547,-8.89
VCC: C3.2 C7.2 C9.2 C13.2 C17.2 C21.2 C24.2 C27.2 D7.2 P1.6 P3.6 R1.2 R5.2 R10.2 R15.2 R19.2 R22.2 R24.2 U1.5 U1.6 U3.5 U3.6 U5.1 U6.5 U6.6 U8.3 U9.5 U9.6 U11.5 U11.6 U12.5 U12.6 U13.5 U13.6 | length 235
  Top Layer w0.5: 52.578,63.681 51.435,64.824 51.435,77.724 52.578,78.867 ; U1.5 U1.5@53.084,62.357 ; U1.6 52.952,62.489 U1.5@53.084,62.357 ; C3.2 C3.2@54.182,58.593 ; C13.2@55.212,36.162 52.747,36.162 52.747,36.661 51.689,37.719 51.689,41.021 50.673,42.037 50.673,53.956 50.802,54.085 51.212,54.085 54.483,57.356 54.483,61.849 53.975,62.357 U1.5@53.084,62.357 ; U3.5@55.234,75.066 U3.5 ; C13.2 55.649,35.814 55.949,36.114 55.949,36.38 56.051,36.482 56.051,41 57.023,41.971 57.023,44.831 55.598,46.256 U9.5 55.208,47.117 55.069,46.978 54.522,46.978 54.229,47.271 54.229,50.165 54.702,50.638 R15.2@55.617,50.638 ; R15.2@55.744,50.765 R15.2@55.986,51.008 ; C27.2 88.673,75.311 88.833,75.471 ; 86.741,52.07 86.741,51.816 86.741,42.799 88.138,41.402 88.773,41.402 ; 86.741,59.651 87.034,59.944 U12.5 U12.6 88.733,56.673 R22.2 ; 86.868,64.516 91.694,64.516 122.809,64.516 124.714,62.611 124.714,56.342 P3.6@124.633,56.261
  Top Layer w0.55: 58.293,65.913 58.293,59.758 58.615,59.436 73.719,59.436 74.041,59.114 P1.6@74.041,56.3
  Top Layer w0.6: 52.578,63.681 U1.6 ; U1.5@52.747,62.357 U1.6@52.747,63.307 ; 55.086,74.918 55.21,74.903 55.425,74.876 55.479,74.869 U3.6 55.494,74.346 55.494,74.142 55.626,74.01 C7.2@55.626,69.723 ; C7.2@55.622,69.723 55.622,68.699 55.626,68.695 55.626,68.58 58.293,65.913 ; U13.6 88.833,75.471
  Top Layer w0.8: R19.2@88.661,36.992 85.216,36.992 85.148,37.06 85.148,37.788 83.312,39.624 83.312,48.641 86.741,52.07 86.741,59.651 86.741,59.944 86.741,64.516 86.741,72.898 U13.6@88.833,74.99
  Top Layer w1: U8.3 66.04,14.289 66.359,14.289 68.326,16.256 70.153,16.256 71.03,17.133 71.03,17.78 ; C9.2@69.596,21.971 71.103,20.464 71.103,18.93 U5.1 71.03,18.857 71.03,17.78 ; D7.2 71.03,17.78 ; 86.741,51.816 86.868,51.689 C24.2
pads on no net: P3.3 U1.4 U3.4 U6.4 U9.4 U11.4 U12.4 U13.4
copper on no net: | length 580.7
  Top Layer w0.2: 79.258,80.137 29.444,80.137 29.327,80.02 29.327,30.089 29.444,29.972 79.258,29.972 79.375,30.089 79.375,80.02 ; 79.492,30.089 79.492,80.02 ; 79.609,29.972 129.423,29.972 ; 79.609,80.137 129.423,80.137 ; 129.54,30.089 129.54,80.02
  Bottom Layer w0.2: 29.972,20.701 29.972,21.336 34.544,25.908 ; 79.375,151.892 79.502,152.019
  Bottom Layer w0.254: 29.972,20.701 29.972,-19.304 33.528,-22.86 72.39,-22.86 76.327,-18.923 76.327,22.225 72.644,25.908 34.544,25.908

## Polygon pours and split planes (outlines as drawn)
GND on Bottom Layer "GND_L02_P002" (solid, pour order 2): 130.175,42.291
no net on Bottom Layer "NONET_L02_P000" (solid, pour order 0): 104.902,40.513

## Keep-outs
Keep-Out Layer:
  lines w1: 0,-0.381 0,85 150,85 150,0 0,0

## Other copper
Top Layer:
  region net NetC25_1: 110.772,66.48 110.772,79.48 97.772,79.48 97.772,66.48
  region net NetC22_1: 110.772,48.48 110.772,61.48 97.772,61.48 97.772,48.48
  region net NetC19_1: 110.772,30.48 110.772,43.48 97.772,43.48 97.772,30.48
  rectangle net NetC1_1: 34.836,61.471 47.836,74.471
  rectangle net NetC15_1: 60.836,35.471 73.836,48.471
  rectangle net NetC5_1: 60.836,61.471 73.836,74.471
  rectangle net NetC10_1: 34.836,35.471 47.836,48.471
  region net GND: 72.517,0.953 72.517,-0.581 73.179,-1.243 73.787,-0.635 73.787,0.953
  region net o14: 70.485,0.953 70.485,-0.899 70.703,-1.116 71.02,-1.116 71.755,-0.381 71.755,0.953
  region net o11: 69.469,3.429 68.199,3.429 67.818,3.048 67.818,2.54 68.199,2.159 69.469,2.159
  region net o13: 69.469,1.397 68.199,1.397 67.818,1.016 67.818,0.508 68.199,0.127 69.469,0.127
  region net o11: 68.707,3.429
  region net o12: 71.755,2.857 71.755,4.255 71.083,4.926 70.759,4.926 70.485,4.653 70.485,2.857
  region net NetP2_6: 73.787,2.794 73.787,4.064 73.406,4.445 72.898,4.445 72.517,4.064 72.517,2.794
  region net o22: 121.222,56.07 121.221,57.341 120.587,57.975 119.951,57.34 119.951,56.07
  region net o21: 120.015,54.483 120.015,53.213 120.396,52.832 120.904,52.832 121.285,53.213 121.285,54.483
  region net o22: 120.269,57.15
  region net o23: 123.444,56.642 123.444,58.039 122.772,58.711 122.448,58.711 122.174,58.437 122.174,56.642
  region net VCC: 125.349,56.515 125.349,57.785 124.968,58.166 124.46,58.166 124.079,57.785 124.079,56.515
  region net GND: 117.348,70.104 117.729,70.104 119.38,71.755 119.38,78.613 119.888,79.121 127.762,79.121 128.651,78.232 128.651,31.623 127.889,30.861 112.903,30.861 112.268,31.496 112.268,32.512 113.03,33.274 118.745,33.274 119.38,33.909 119.38,41.021 116.586,43.815 117.221,44.45 122.174,44.45 123.253,45.529 123.19,45.593 123.19,52.578 126.365,55.753 125.984,56.134 125.984,63.373 123.698,65.659 116.967,65.659 116.84,65.786 116.84,70.278
  region net GND: 90.278,78.34 88.988,79.629 80.772,79.629 80.137,78.994 80.137,31.623 81.026,30.734 95.504,30.734 96.774,32.004 96.647,32.131 96.647,33.274 95.504,32.131 95.504,32.004 95.377,32.131 84.963,32.131 84.963,32.258 82.042,35.179 82.042,50.292 85.217,53.467 85.217,72.644 83.439,74.422 83.439,77.216 84.074,77.851 84.201,77.724 85.598,77.724 86.233,78.359 86.487,78.359
  region net VCC: 74.93,56.261 74.93,57.531 74.549,57.912 74.041,57.912 73.66,57.531 73.66,56.261
  region net o4: 71.706,54.381 71.706,53.086 71.814,52.978 72.487,52.978 72.976,53.467 72.976,54.381
  region net o2: 73.025,56.388 73.025,57.785 72.353,58.457 72.029,58.457 71.755,58.183 71.755,56.388
  region net o1: 69.85,56.896
  region net o3: 70.612,54.991 69.342,54.991 68.961,54.61 68.961,54.102 69.342,53.721 70.612,53.721
  region net o1: 70.612,57.023 69.342,57.023 68.961,56.642 68.961,56.134 69.342,55.753 70.612,55.753
  region net VCC: 53.213,35.56 55.753,35.56 57.658,37.465 57.658,38.608 56.769,39.497 56.769,40.513 55.626,40.513 55.118,40.005 55.118,38.227 53.528,36.637 52.952,36.637
  region net VCC: 54.864,75.311 54.356,75.311 53.594,76.073 53.594,79.375 51.562,79.375 51.562,76.581 51.562,68.453 52.451,69.342 52.451,73.152 53.34,74.041 55.118,74.041
  region net GND: 58.42,69.85 60.071,71.501 60.071,69.381 59.778,69.088 59.778,65.747 59.69,65.659 59.69,66.802 58.293,68.199 58.293,69.088
  region net GND: 59.944,72.517
  region: 37.846,59.817
  region: 31.623,79.121 31.242,79.121 30.353,78.232 30.353,70.485 30.861,69.977 33.02,69.977 33.528,70.485 33.528,75.438 34.798,76.708 35.306,76.708 35.814,77.216 35.814,78.359 34.925,79.248
  region net GND: 69.469,77.851 69.469,78.232 70.358,79.121 77.089,79.121 78.867,77.343 78.867,71.12 77.724,69.977 76.073,69.977 75.438,70.612 75.438,74.803 74.422,75.819 69.85,75.819 69.469,76.2
  region net GND: 51.308,60.706 51.308,60.579 50.673,59.944 33.782,59.944 33.02,60.706 31.924,60.706 31.877,60.753 31.416,60.753 30.353,59.69 30.353,50.165 33.147,50.165 39.37,56.388 51.054,56.388 51.943,57.277 51.943,60.169
  region net GND: 78.74,42.164 77.47,40.894 75.438,40.894 75.438,34.925 74.676,34.163 60.071,34.163 60.071,37.465 59.817,37.465 56.261,33.909 56.261,33.274 46.736,33.274 45.847,34.163 34.163,34.163 32.893,35.433 32.893,40.386 32.004,41.275 30.353,41.275 30.353,32.131 31.75,30.734 75.438,30.734 78.74,34.036
  region net GND: 76.835,60.833 78.359,60.833 78.74,60.452 78.74,51.308 78.232,50.8 78.232,50.292 76.915,50.292 76.581,50.626 69.85,50.626 69.85,51.181 72.136,51.181 72.136,51.308 73.914,53.086 73.914,54.864 75.565,54.864 76.454,55.753 76.454,60.071
  region: 78.105,60.452
  region net nol: 72.517,-22.098 75.692,-18.923 75.692,-10.668 73.914,-8.89 72.39,-8.89 68.199,-13.081 68.199,-21.336 68.961,-22.098
  region net faz: 63.627,-21.971 63.5,-21.971 63.373,-22.098 61.722,-22.098 61.214,-21.59 61.214,-11.382 63.368,-9.525 66.421,-9.525 66.421,-21.209 65.532,-22.098 62.357,-22.098
  region net of1: 30.759,-11.43 32.358,-11.43 35.914,-14.986 37.946,-17.018 37.946,-18.796 34.09,-17.934
  region net of4: 58.039,-20.193 59.309,-18.923 59.309,-14.732 58.801,-13.081 58.039,-13.271
  region net of4: 54.229,-14.732 54.229,-21.463 54.864,-22.098 58.801,-22.098 59.563,-21.336 59.563,-14.194 54.767,-14.194
  region net of3: 48.133,-19.939 46.99,-18.796 46.99,-14.605 47.371,-14.224 49.657,-14.224 51.816,-14.224 52.324,-14.732 52.324,-18.923 51.308,-19.939
  region net of3: 46.99,-15.875 46.99,-21.463 47.625,-22.098 51.689,-22.098 52.324,-21.463 52.324,-18.034
  region net of2: 40.259,-13.97 40.259,-21.463 40.894,-22.098 44.831,-22.098 45.466,-21.463 45.466,-14.478 44.958,-13.97
  region net of1: 30.607,-12.827 30.607,-19.177 33.528,-22.098 37.338,-22.098 38.1,-21.336 38.1,-17.145 36.322,-15.367 33.02,-15.367
  region net of1: 30.734,-13.208 30.734,-18.796 31.877,-19.939 35.433,-19.939 35.433,-17.907 36.195,-17.145

## Silkscreen, mask and mechanical layers (free items; w line width, h text height)
Mechanical 2:
  lines w0.2: 27.686,80.264 160.909,80.264 ; 29.21,77.089 29.21,151.892 ; 41.021,29.972 161.417,29.972 ; 79.375,76.835 79.375,151.892

## Text inside footprints (layer, text, board x,y; h text height)
P1: Top Overlay "6" at 76.405,56.153 h1.27; Top Overlay "5" at 76.405,53.613 h1.27; Top Overlay "2" at 67.261,56.153 h1.27; Top Overlay "1" at 67.769,53.613 h1.27
P2: Top Overlay "1" at 66.626,0.019 h1.27; Top Overlay "2" at 66.118,2.559 h1.27; Top Overlay "5" at 75.262,0.019 h1.27; Top Overlay "6" at 75.262,2.559 h1.27
P3: Top Overlay "6" at 126.697,56.153 h1.27; Top Overlay "5" at 126.697,53.613 h1.27; Top Overlay "2" at 117.553,56.153 h1.27; Top Overlay "1" at 118.061,53.613 h1.27
U5: Top Overlay "-" at 68.45,17.402 h0.81 r270; Top Overlay "+" at 70.74,17.401 h0.81 r270